# Altium PCB PCB_Final.PcbDoc (part 2 of 2)
Units mm, origin at the board's own origin, x right, y up, seen from the top; angles counter-clockwise.
Board outline 170 x 130 mm, 2 copper layers (Top Layer, Bottom Layer); 113 components, 88 nets, 409 pads, 43 vias.
Unrouted connection lines stored in the file: 10.
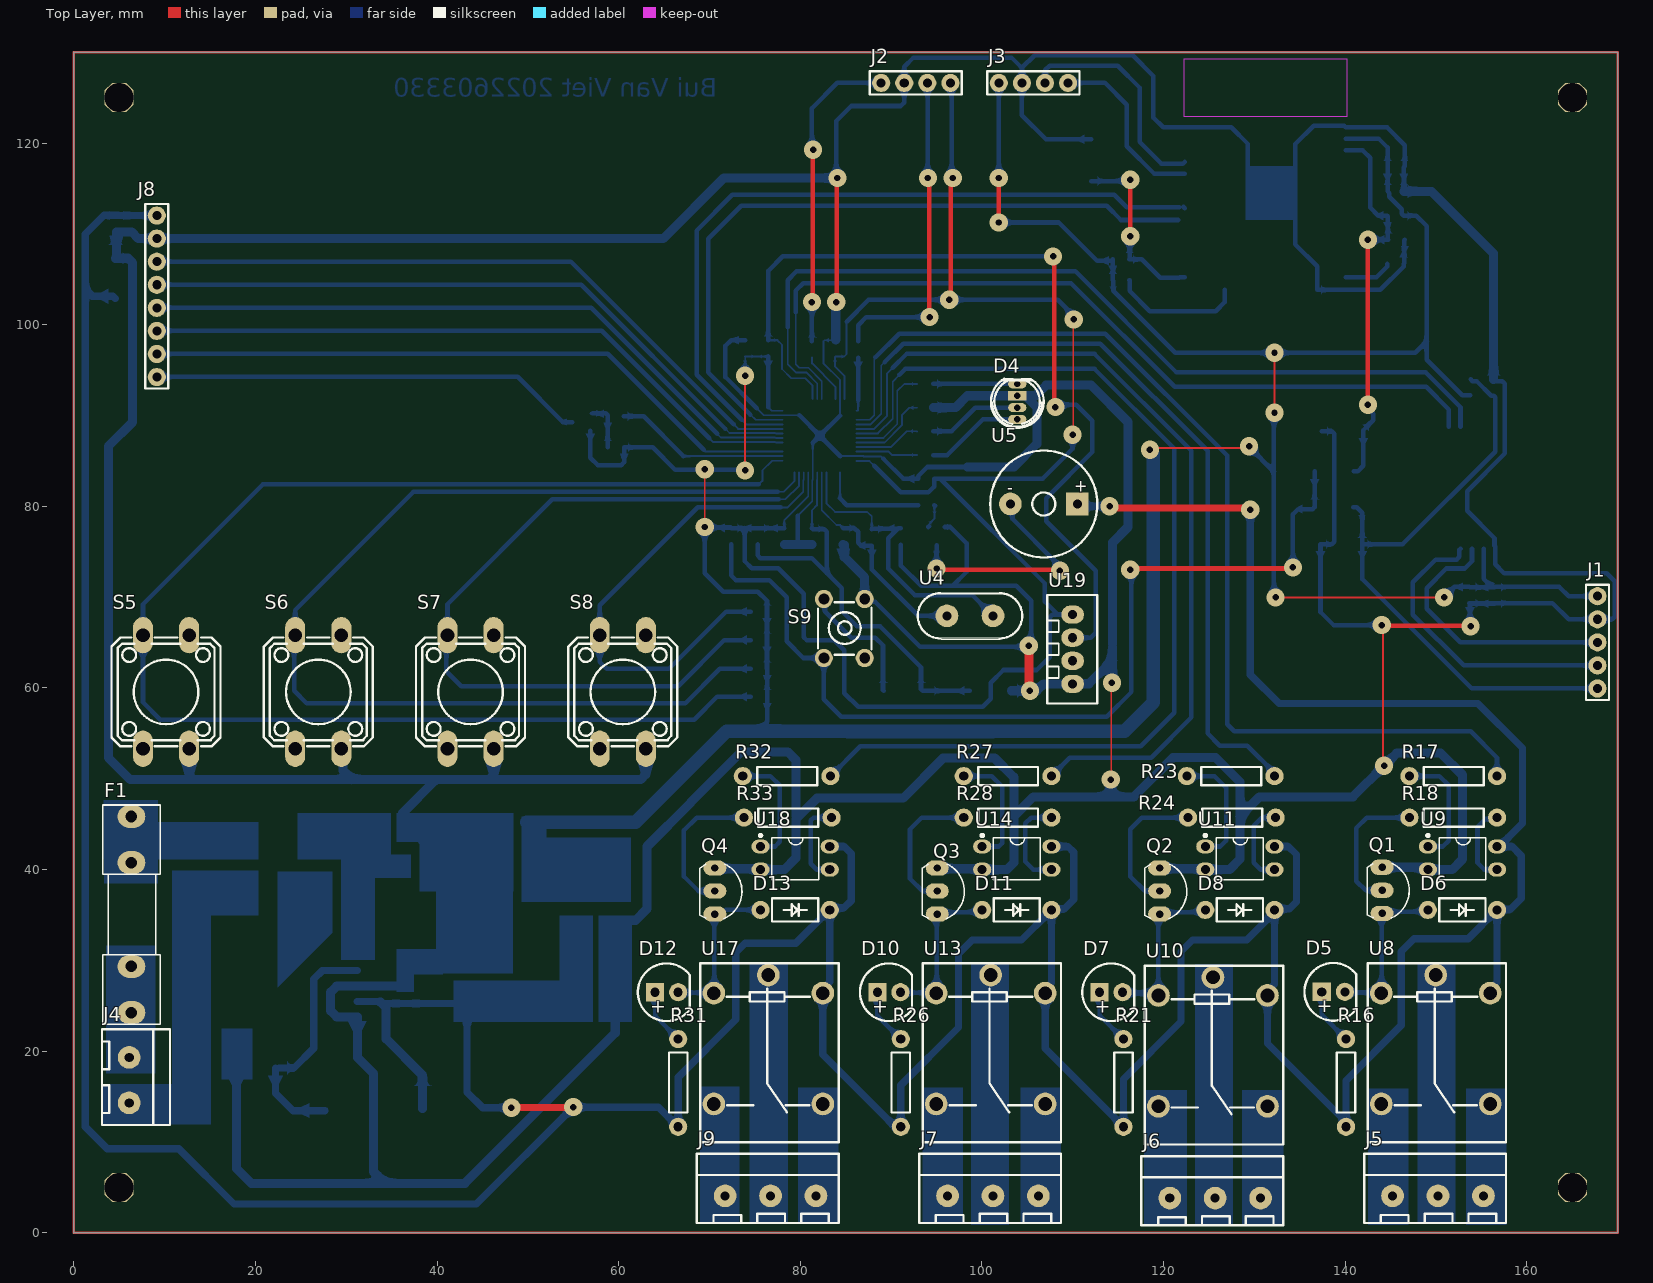
[diagram p0: Top Layer view]

## Other copper (continued)
Bottom Layer: (continued)
  rectangle net NetJ6_3: 117.856,0.762 122.555,15.748
  rectangle net NetJ6_2: 123.444,0.889 127.635,29.591
  rectangle net NetJ6_1: 128.651,0.762 133.223,15.748
  rectangle net NetJ5_3: 142.494,0.889 146.939,15.875
  rectangle net NetJ5_2: 147.955,1.143 152.146,29.718
  rectangle net NetJ5_1: 153.289,0.889 157.734,15.875
  region net NetF1_2: 3.302,47.625 9.271,47.625 9.271,45.212 20.32,45.212 20.32,41.148 3.302,41.148
  region net +12: 29.464,30.099 33.147,30.099 33.147,41.148 29.464,41.148
  region net GND: 22.479,39.751 28.448,39.751 28.448,33.02 22.479,27.051
  region net GND: 35.56,46.228 46.609,46.228 48.387,46.228 48.387,37.592 38.1,37.592 38.1,42.799 37.846,43.053 35.56,43.053
  region net +12: 24.638,46.228 24.638,44.958 24.638,41.148 31.07,41.148 31.07,39.116 37.084,39.116 37.084,41.656 34.925,41.656 34.925,46.228 25.781,46.228
  text "Bui Van Viet 2022603330" at 70.866,124.375 h3.5

## Text inside footprints (layer, text, board x,y; h text height)
D5: Top Overlay "-" at 139.397,24.15 h1.52; Top Overlay "+" at 136.857,24.277 h1.52
D7: Top Overlay "-" at 114.928,24.105 h1.52; Top Overlay "+" at 112.388,24.231 h1.52
D10: Top Overlay "-" at 90.46,24.105 h1.52; Top Overlay "+" at 87.92,24.231 h1.52
D12: Top Overlay "-" at 65.991,24.105 h1.52; Top Overlay "+" at 63.451,24.231 h1.52
U3: Bottom Overlay "*" at 149.86,73.66 h1.27 r270; Mechanical 13 "*" at 155.86,76.302 h1.27 r270
U5: Top Overlay "-" at 102.768,81.425 h1.27; Top Overlay "+" at 110.134,81.594 h1.27
U7: Bottom Overlay "*" at 17.361,36.684 h1.27 r180; Mechanical 13 "*" at 19.177,37.201 h1.27 r180